# Altium PCB LB77.PcbDoc
Units mm, origin at the board's own origin, x right, y up, seen from the top; angles counter-clockwise.
Board outline 115 x 70 mm, 2 copper layers (Top Layer, Bottom Layer), stack 1.571 mm thick; 59 components, 48 nets, 267 pads, 356 vias.
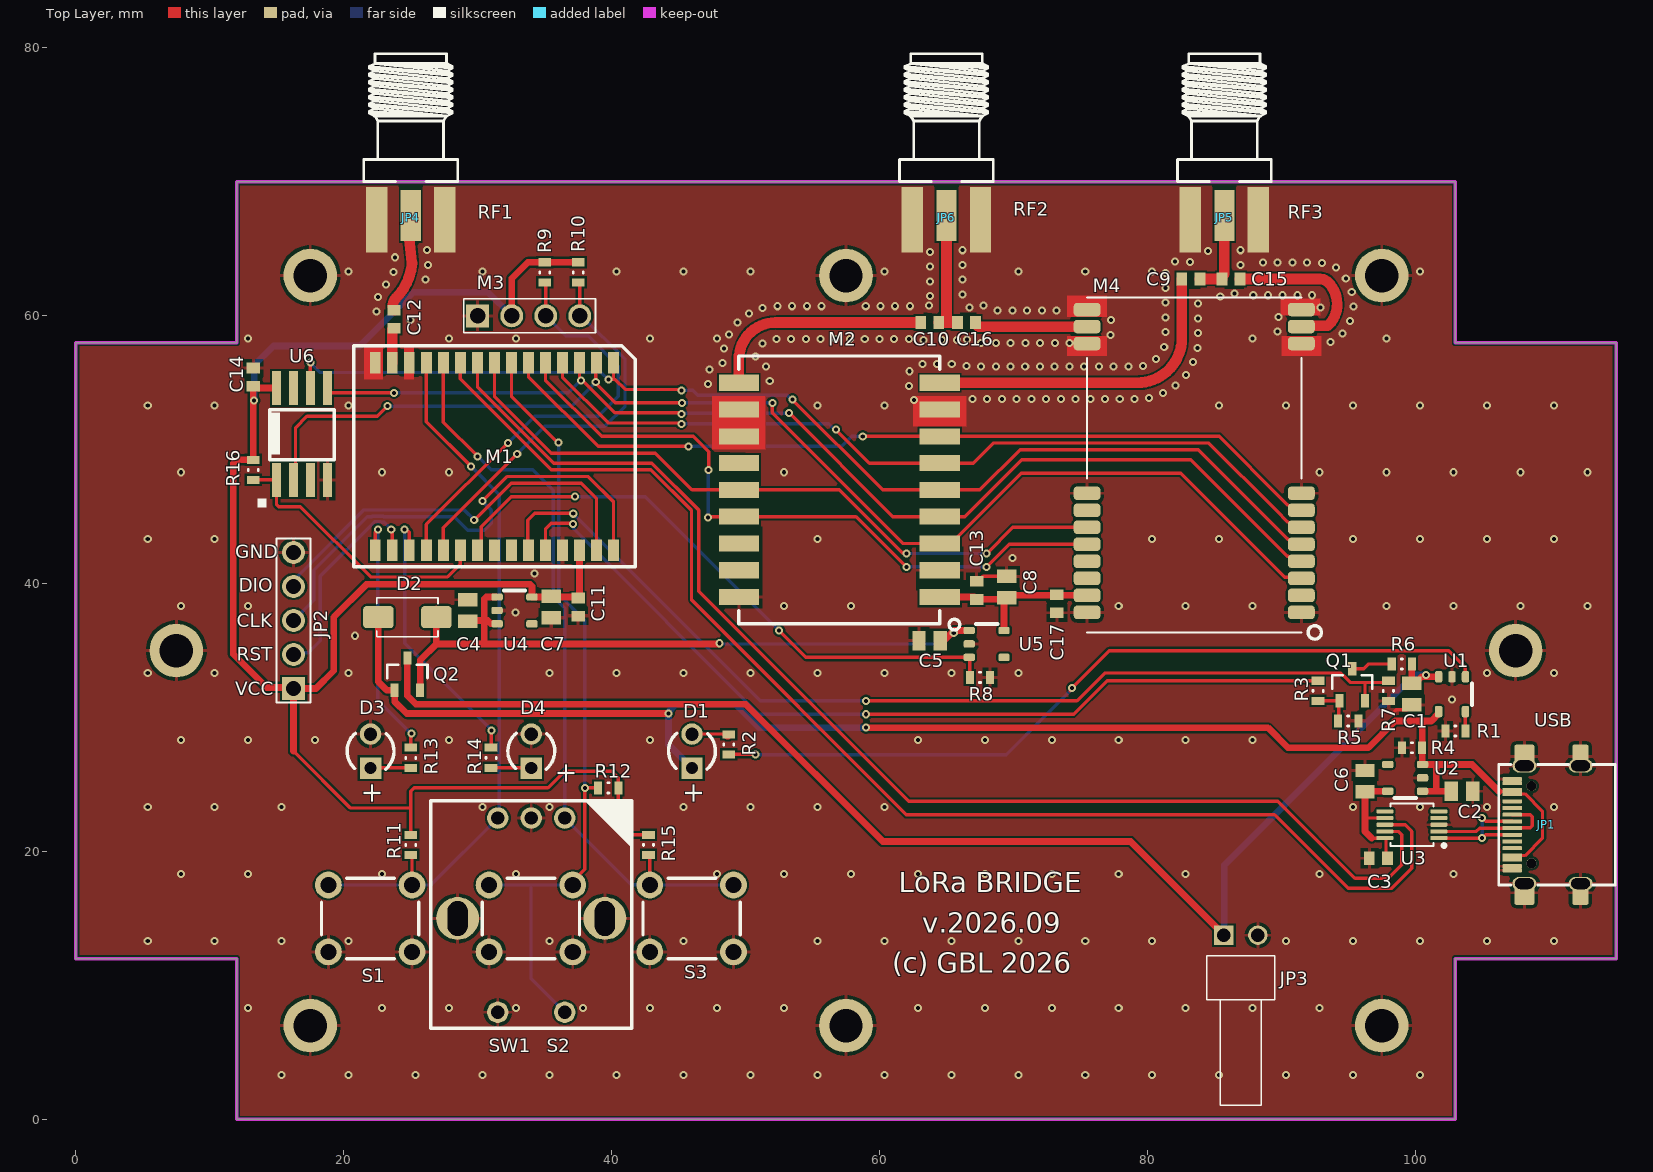
[diagram p0: Top Layer view]
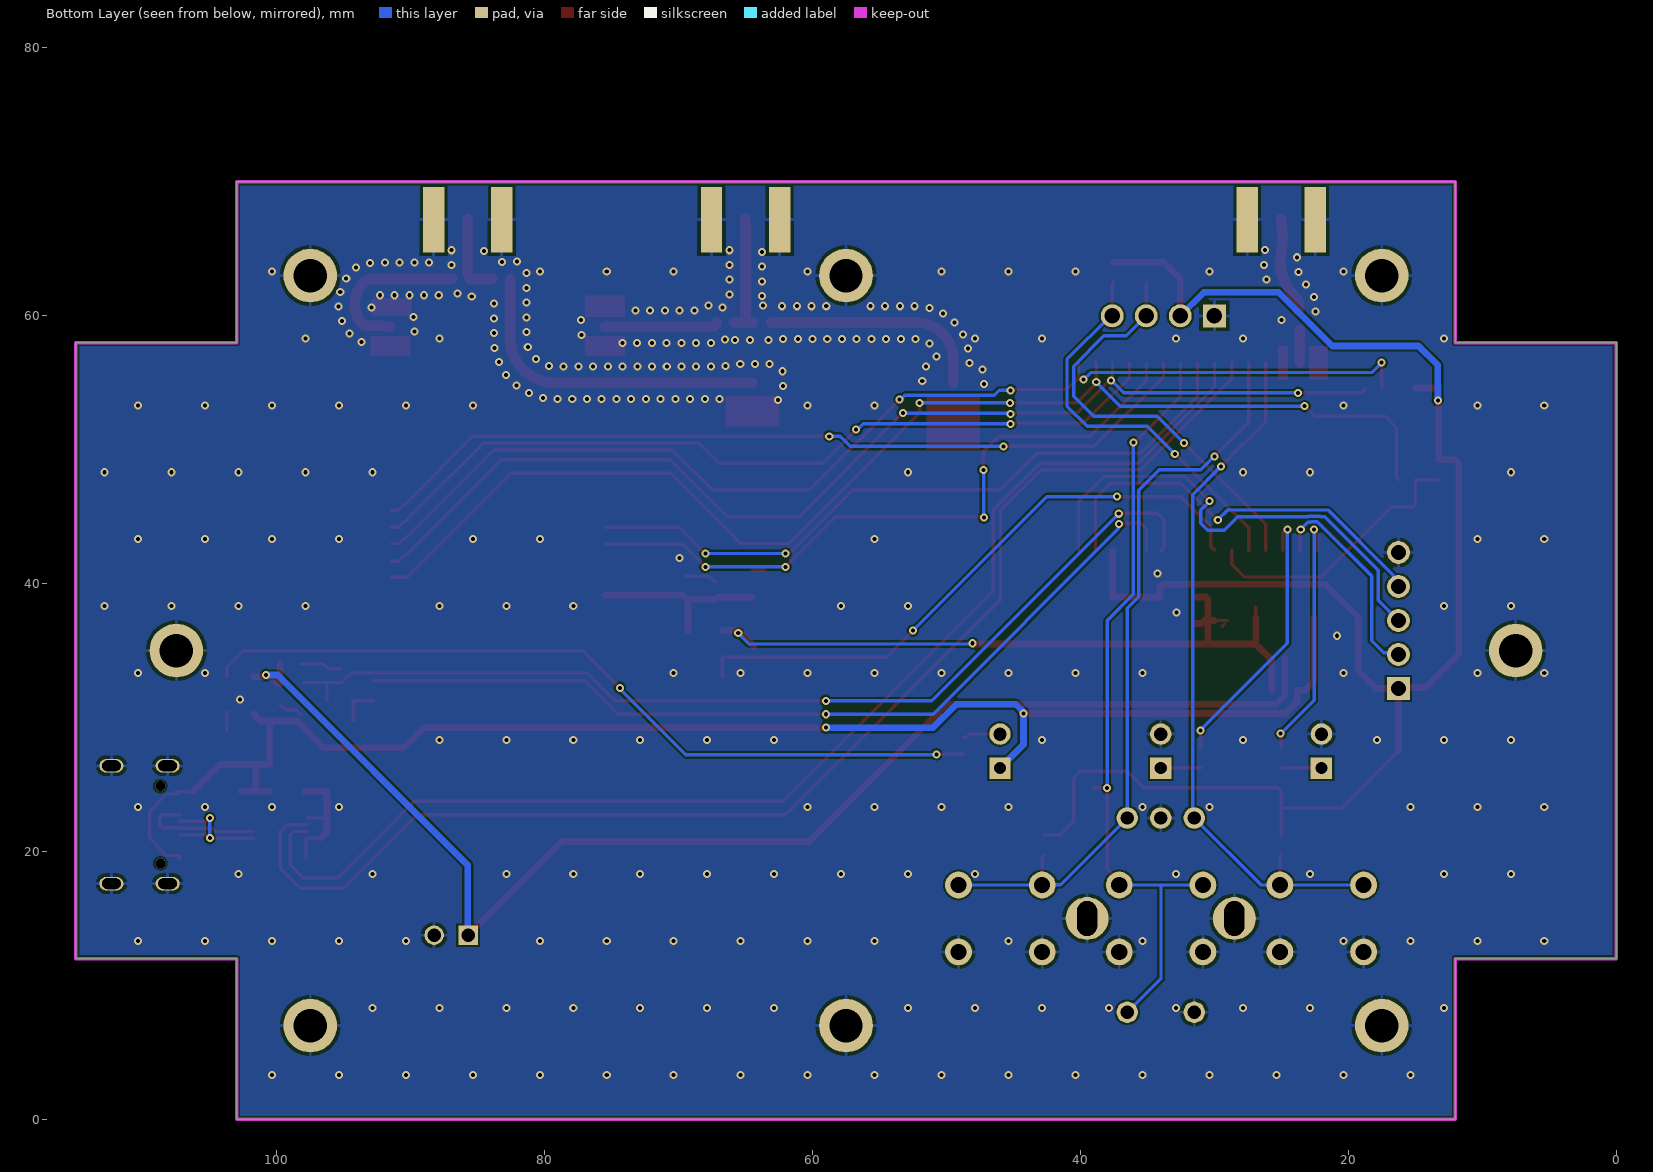
[diagram p1: Bottom Layer view, seen from below]
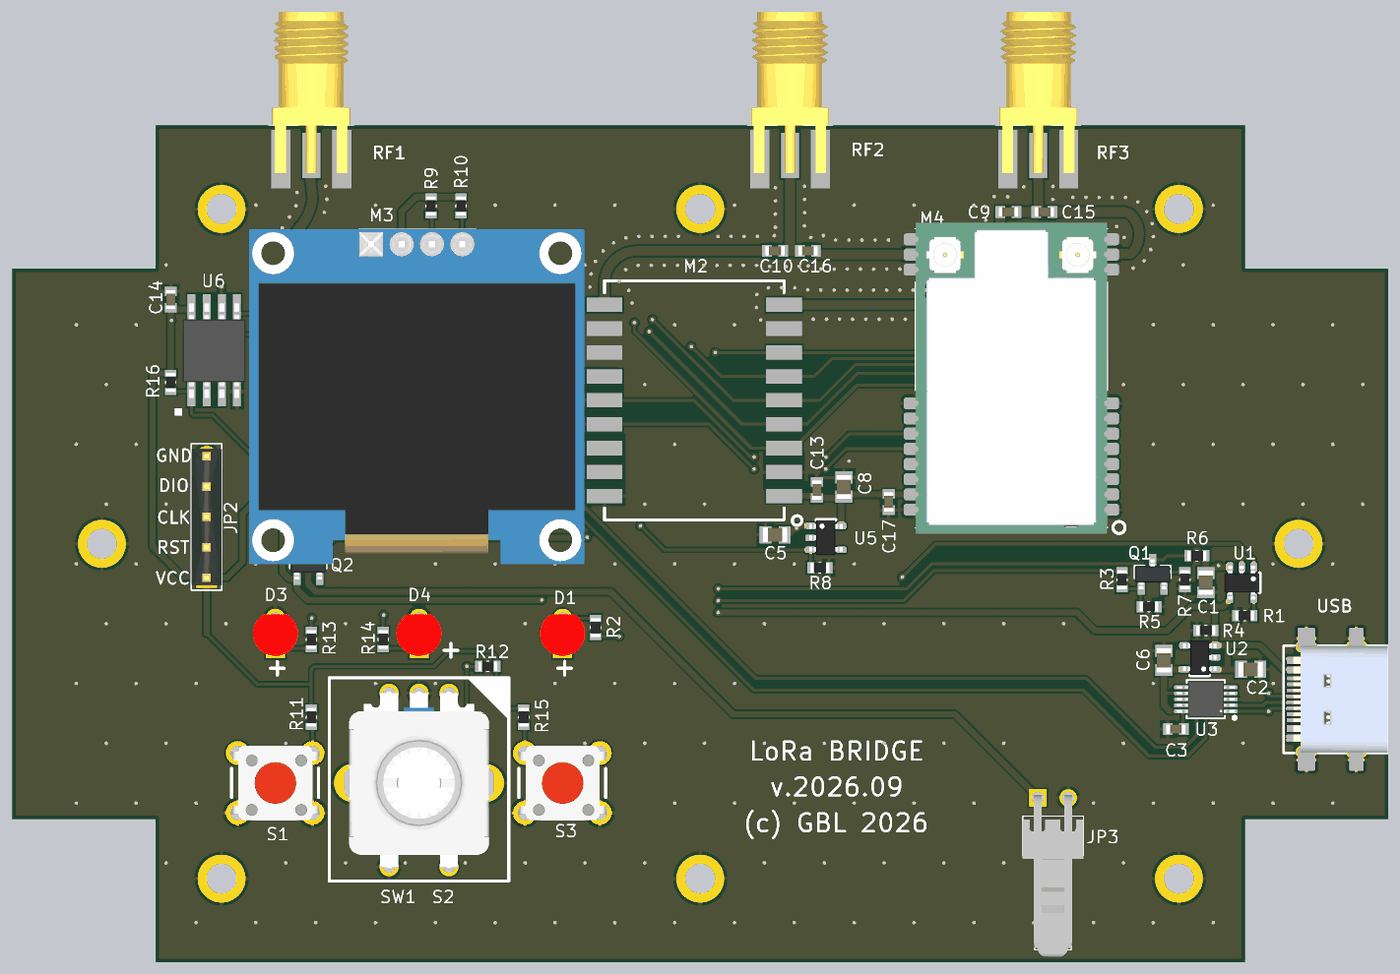
[diagram p2: 3D render of the assembled board from above, using the file's embedded part models]

## Layer stack, top to bottom
Top Solder: solder mask 0.0102, Solder Resist, Dk 3.5
Top Layer: signal copper 0.0356
Dielectric 1: dielectric 1.5, FR-4, Dk 4.8
Bottom Layer: signal copper 0.0356
Bottom Solder: solder mask 0.0102, Solder Resist, Dk 3.5

## Board outline
103,0 12,0 12,12 0,12 0,58 12,58 12,70 103,70 103,58 115,58 115,12 103,12

## Design rules (kind name [scope] priority, off if disabled: settings)
Clearance [All] p1: gap=0.15 ignorepadtopadclearanceinfootprint=FALSE
ComponentClearance ComponentClearance_1 [InComponent('SW1') vs InComponent('S2')] p1: gap=-20 collisioncheckmode=3 verticalgap=-20 showdistances=FALSE
ComponentClearance [All] p2: gap=0.25 collisioncheckmode=3 verticalgap=0.25 showdistances=FALSE
HoleSize [All] p1: absolutevalues=TRUE maxlimit=3.5 minlimit=0.025 maxpercent=80.000 minpercent=20.000
MinimumSolderMaskSliver [All] p1: minsoldermaskwidth=0.05
PolygonConnect PolygonConnect_3 [HasFootprint('SMA_F_EDGE') vs IsNamedPolygon('GND_L01_P000')] p1: connectstyle=Direct reliefconductorwidth=0.254 reliefentries=4 polygonreliefangle="90 Angle" airgapwidth=0.254
PolygonConnect PolygonConnect_2 [All vs IsNamedPolygon('GND_L01_P000') Or IsNamedPolygon('GND_L02_P001')] p2: thpad.connectstyle=Relief thpad.reliefconductorwidth=0.254 thpad.reliefentries=4 thpad.polygonreliefangle="90 Angle" thpad.airgapwidth=0.254 smdpad.connectstyle=Relief smdpad.reliefconductorwidth=0.254 smdpad.reliefentries=4 smdpad.polygonreliefangle="90 Angle" smdpad.airgapwidth=0.254 via.connectstyle=Direct via.reliefconductorwidth=0.254 via.reliefentries=4 via.polygonreliefangle="90 Angle" via.airgapwidth=0.254
PolygonConnect [All] p3: connectstyle=Relief reliefconductorwidth=0.254 reliefentries=4 polygonreliefangle="90 Angle" airgapwidth=0.254
RoutingVias [All] p1: holewidth=0.711 width=1.27 viastyle="Through Hole" minholewidth=0.711 minwidth=1.27 maxholewidth=0.711 maxwidth=1.27
SilkToSilkClearance [All] p1: silktosilkclearance=0.1
SilkToSolderMaskClearance [IsPad] p1: minsilkscreentomaskgap=0.1 clearancetoexposedcopper=TRUE
SolderMaskExpansion [All] p1: expansion=0 istentingtop=FALSE
SupplyNets "Schematic Supply Nets_5" [InNet('VBUS')] p1: voltage=0.000
SupplyNets "Schematic Supply Nets_4" [InNet('VCC2')] p2: voltage=0.000
SupplyNets "Schematic Supply Nets_3" [InNet('GND')] p3: voltage=0.000
SupplyNets "Schematic Supply Nets_2" [InNet('VCC1')] p4: voltage=0.000
SupplyNets "Schematic Supply Nets_1" [InNet('VCC')] p5: voltage=0.000
SupplyNets "Schematic Supply Nets" [InNet('V_BATT')] p6: voltage=0.000
Width [All] p1: maxlimit=2 minlimit=0.2 preferedwidth=0.25
25 further rules are at their usual default settings.

## Components (designator, comment, footprint, x,y, rotation, side; value= is the part's Value field where it differs from the comment)
C1 "10uF" C-0805 99.75,31.75 r270 top
C2 "10uF" C-0805 103.5,24.5 r0 top
C3 "100nF" C-0603 97.25,19.5 r180 top
C4 "10uF" C-0805 29.25,38 r90 top
C5 "10uF" C-0805 63.75,35.75 r180 top
C6 "10uF" C-0805 96.25,25.25 r90 top
C7 "10uF" C-0805 35.5,38.25 r270 top
C8 "CAPN" C-0805 69.5,39.75 r90 top
C9 "100pF" C-0603 83.25,62.75 r0 top
C10 "100pF" C-0603 63.75,59.5 r0 top
C11 "1nF" C-0603 37.5,38.25 r270 top
C12 "100pF" C-0603 23.75,59.75 r90 top
C13 "1nF" C-0603 67.25,39.5 r90 top
C14 "100nF" C-0603 13.25,55.425 r270 top
C15 "100pF" C-0603 86.25,62.75 r180 top
C16 "100pF" C-0603 66.5,59.5 r180 top
C17 "1nF" C-0603 73.25,38.5 r270 top
D1 "DLED" LED_3mm_RED 46,27.5 r90 top locked
D2 "SS14" D-SMA 24.75,37.5 r0 top
D3 "DLED" LED_3mm_RED 22,27.5 r90 top locked
D4 "DLED" LED_3mm_RED 34,27.5 r90 top locked
JP1 "L-KLS1-5473" USB_C_SMD_SLOT 107.25,22 r90 top
JP2 "HEADER 5" PLS1-5 16.25,32.17 r90 top
JP3 "CON2" WH-02R 85.71,13.75 r0 top
JP4 "EM-SA071-GGT" SMA_F_EDGE 25,68.75 r270 top
JP5 "EM-SA071-GGT" SMA_F_EDGE 85.75,68.75 r270 top
JP6 "EM-SA071-GGT" SMA_F_EDGE 65,68.75 r270 top
M1 "E77-400M22S" E77XX-M22 31.25,49.5 r270 top
M2 "LORA2021" LORA1121 57,47 r180 top
M3 "OLED0_96" OLED096_I2C 30,60 r0 top locked
M4 "E80-400M2213S" E80 83.5,48.86 r180 top
Q1 "2N7002" SOT-23 95.3,32.45 r90 top
Q2 "IRLML6401" SOT-23 24.75,33.25 r90 top
R1 "4k7" R-0603 103,29 r0 top
R2 "1k" R-0603 48.75,28 r90 top
R3 "1k" R-0603 92.75,32 r90 top
R4 "100k" R-0603 99.75,27.75 r0 top
R5 "1M" R-0603 95,29.75 r180 top
R6 "100k" R-0603 99,34 r0 top
R7 "10k" R-0603 98,32 r90 top
R8 "100k" R-0603 67.5,33 r180 top
R9 "10k" R-0603 35,63.25 r90 top
R10 "10k" R-0603 37.5,63.25 r90 top
R11 "100k" R-0603 25,20.5 r90 top
R12 "100k" R-0603 39.75,24.75 r0 top
R13 "1k" R-0603 25,27 r90 top
R14 "1k" R-0603 31,27 r90 top
R15 "100k" R-0603 42.75,20.5 r90 top
R16 "100k" R-0603 13.25,48.5 r90 top
S1 "KLS7-TS3602 -3 15-180" KN_MIN 22,15 r0 top
S2 "KLS7-TS3602 -3 15-180" KN_MIN 34,15 r0 top locked
S3 "KLS7-TS3602 -3 15-180" KN_MIN 46,15 r0 top
SW1 "EC11" EC11 34,15 r270 top locked
U1 "STC4054GR" SOT-23-5 102.75,31.75 r270 top
U2 "LP5907MFX-3.0" SOT-23-5 99.25,25.5 r180 top
U3 "CH340E" MSOP-10 99.75,22 r90 top value={Value}
U4 "LP5907MFX-3.0" SOT-23-5 32.75,38 r0 top
U5 "LP5907MFX-3.0" SOT-23-5 68,35.5 r0 top
U6 "W25Q64FV" SOIC8-208 14.98,47.75 r90 top

## Footprints (in the part's own frame and the unit in brackets; to place one, negate y for a bottom-side part, rotate by r counter-clockwise, add the part's x,y. Pads: shape width x height; smd on the part's side, far side on the other; paste and mask are expansions set on the pad)
C-0603 [mm] "Chip Capacitor, 2-Leads, Body 1,60x0,80mm, IPC Medium Density"
  rect 0.8x1 smd: 1(-0.675,0) 2(0.675,0)
  body extent -0.8,-0.4 0.8,0.4, height 0.8
C-0805 [mm] "Chip Capacitor, 2-Leads, Body 2,00x1,25mm, IPC Medium Density"
  rect 1x1.45 smd: 1(-0.8,0) 2(0.8,0)
  body extent -1,-0.62 1,0.63, height 1.25
D-SMA [mm] "Diode, Molded Body; 4.315 mm L X 2.605 mm W X 2.41 mm H body"
  rrect30% 2.27x1.65 smd: 1(-2.165,0) 2(2.165,0)
  silkscreen extent -2.29,-1.46 2.29,1.46, body extent -2.61,-1.3 2.61,1.3, height 2.41
E77XX-M22 [mm]
  rect 1.6x0.8 smd: 1(-7,8.89) 2(-7,7.62) 3(-7,6.35) 4(-7,5.08) 5(-7,3.81) 6(-7,2.54) 7(-7,1.27) 8(-7,0) 9(-7,-1.27) 10(-7,-2.54) 11(-7,-3.81) 12(-7,-5.08) 13(-7,-6.35) 14(-7,-7.62) 15(-7,-8.89) 16(7,-8.89) 17(7,-7.62) 18(7,-6.35) 19(7,-5.08) 20(7,-3.81) 21(7,-2.54) 22(7,-1.27) 23(7,0) 24(7,1.27) 25(7,2.54) 26(7,3.81) 27(7,5.08) 28(7,6.35) 29(7,7.62) 30(7,8.89)
  silkscreen extent -8.25,-10.5 8.25,10.5, body extent -7,-9.68 7,10.3, height 2.7
E80 [mm]
  rrect50% 2x1 smd: 1(-8,11) 2(-8,9.73) 3(-8,8.46) 4(-8,7.19) 5(-8,5.92) 6(-8,4.65) 7(-8,3.38) 8(-8,2.11) 11(-8,-9.06) 12(-8,-10.33) 13(-8,-11.6) 14(8,-11.6) 15(8,-10.33) 16(8,-9.06) 19(8,2.11) 20(8,3.38) 21(8,4.65) 22(8,5.92) 23(8,7.19) 24(8,8.46) 25(8,9.73) 26(8,11)
  silkscreen extent -9.5,-12.5 8,13, body extent -8,-13 8,13, height 2.85
EC11 [mm] "ALPS rotary encoder"
  round 1.6 hole 1: 1(-7.5,2.5) 2(-7.5,0) 3(-7.5,-2.5) 4(7,-2.5) 5(7,2.5)
  round 3.2 hole 1.5 slot 2.6 at 0 deg: 6(0,5.5) 6(0,-5.5)
  silkscreen extent -8.8,-7.5 8.2,7.5, body extent -7.73,-5.86 7.22,5.86, height 19.5
KN_MIN [mm]
  round 2 hole 1.2 mask+0.05: 1(-3.15,-2.5) 1(3.1,-2.5) 2(-3.15,2.5) 2(3.1,2.5)
  silkscreen extent -3.66,-3 3.6,3, body extent -3.95,-3.1 3.95,3.1, height 7.01
LED_3mm_RED [mm]
  rect 1.6x1.6 hole 0.9: 1(-1.27,0)
  round 1.6 hole 1: 2(1.27,0)
  silkscreen extent -1.34,-1.75 1.34,1.75, body extent -1.9,-1.9 1.6,1.9, height 5.75
LORA1121 [mm]
  rect 3x1.2 smd: 1(-7.5,8) 2(-7.5,6) 3(-7.5,4) 4(-7.5,2) 5(-7.5,0) 6(-7.5,-2) 7(-7.5,-4) 8(-7.5,-6) 9(-7.5,-8) 10(7.5,-8) 11(7.5,-6) 12(7.5,-4) 13(7.5,-2) 14(7.5,0) 15(7.5,2) 16(7.5,4) 17(7.5,6) 18(7.5,8)
  silkscreen extent -8.99,-10 7.5,10.46, body extent -7.5,-10 7.5,10, height 2
MSOP-10 [mm] "Small Outline Pkg (SOP), 0.50 mm pitch; 10 pin, 3.00 mm L X 3.00 mm W X 1.10 mm H body"
  rrect52% 0.31x1.27 smd: 1(-1,-2.015) 2(-0.5,-2.015) 3(0,-2.015) 4(0.5,-2.015) 5(1,-2.015) 6(1,2.015) 7(0.5,2.015) 8(0,2.015) 9(-0.5,2.015) 10(-1,2.015)
  silkscreen extent -1.68,-2.53 1.6,1.6, body extent -1.5,-2.42 1.5,2.42, height 1.1
OLED096_I2C [mm] "Header, Vertical, 2.54 mm pitch; 0.70 mm lead width, 7 pins, 1 row, 7 pins per row, 16.51 mm L X 2.54 mm W X 7.54 mm H body"
  rect 1.71x1.71 hole 1.14 paste-2539.97: 1(0,0)
  round 1.71 hole 1.14 paste-2539.97: 2(2.54,0) 3(5.08,0) 4(7.62,0)
  silkscreen extent -1.04,-1.27 8.8,1.27, body extent -10.19,-26.7 17.81,1.3, height 7.08
PLS1-5 [mm] "Header, Vertical, 2.54 mm pitch; 0.70 mm lead width, 5 pins, 1 row, 5 pins per row, 11.43 mm L X 2.54 mm W X 7.54 mm H body"
  rect 1.71x1.71 hole 1.14 paste-2539.97: 1(0,0)
  round 1.71 hole 1.14 paste-2539.97: 2(2.54,0) 3(5.08,0) 4(7.62,0) 5(10.16,0)
  silkscreen extent -1.04,-1.27 11.2,1.27, body extent -0.64,-1.27 10.79,1.27, height 7.54
R-0603 [mm] "Chip Resistor, 2-Leads, Body 1,60x0,82mm, IPC Medium Density"
  rect 0.6x0.95 smd: 1(-0.75,0) 2(0.75,0)
  silkscreen extent -0.05,-0.38 0.05,0.38, body extent -0.8,-0.4 0.8,0.4, height 0.45
SMA_F_EDGE [mm] "SMA End Launch Jack for 1.58mm PCB, 50 Ohm, Flat Tab Contact"
  rect 3.81x1.5 smd: 1(1.27,0)
  rect 4.9x1.6 smd: 2(1.575,2.54) 2(1.575,-2.54)
  rect 4.9x1.6 smd far side: 2(1.575,2.54) 2(1.575,-2.54)
  silkscreen extent -10.81,-3.5 -1.28,3.5, body extent -10.73,-3.25 2.77,3.25, height 3.7
SOIC8-208 [mil]
  rect 100x26 smd: 1(0,0) 2(0,-50) 3(0,-100) 4(0,-150) 5(270,-150) 6(270,-100) 7(270,-50) 8(270,0)
  silkscreen extent -80,-170 207,55, body extent -22,-179 289,29, height 39
SOT-23 [mm]
  rect 1x0.6 smd: 1(-1.2,0.95) 2(-1.2,-0.95) 3(1.2,0)
  silkscreen extent -0.3,-1.5 0.7,1.5, body extent -1.25,-1.5 1.25,1.5, height 1.2
SOT-23-5 [mm]
  rrect50% 0.85x0.55 smd mask+0.06: 1(-1.3,1) 2(-1.3,0) 3(-1.3,-1) 4(1.3,-1) 5(1.3,1)
  silkscreen extent -0.8,1.5 0.8,1.5, body extent -1.4,-1.45 1.4,1.45, height 1.45
USB_C_SMD_SLOT [mm] "USB 3.1 Type C"
  rrect20% 1.8x1.2 smd mask+0.07: 1(-5.08,-5.08) 1(5.08,-5.08)
  rrect20% 1.8x1.5 smd mask+0.07: 1(-5.08,-0.9) 1(5.08,-0.9)
  oval 1x1.8 hole 0.8 slot 1.4 at 90 deg: 1(-4.4,-5.1) 1(-4.4,-0.9) 1(4.4,-5.1) 1(4.4,-0.9)
  rrect30% 0.3x1.45 smd paste-2 mask+0.07: A1(-3.1,0) A4(-2.6,0) A9(2.6,0) A12(3.4,0) B1(3.1,0) B4(2.3,0) B9(-2.3,0) B12(-3.4,0)
  rrect30% 0.3x1.45 smd mask+0.07: A5(-1.25,0) A6(-0.25,0) A7(0.25,0) A8(1.25,0) B5(1.75,0) B6(0.75,0) B7(-0.75,0) B8(-1.75,0)
  round 0.75 hole 0.75 unplated paste-2539.97 mask+0.07: MH(-2.885,-1.44) MH(2.885,-1.44)
  silkscreen extent -4.5,-7.69 4.5,1, body extent -4.47,-7.7 4.47,0.2, height 3.2
WH-02R [mm]
  rect 1.45x1.45 hole 1: 1(0,0)
  round 1.45 hole 1: 2(2.54,0)
  silkscreen extent -1.27,-12.7 3.81,-1.52, body extent -1.3,-13.3 3.8,0.27, height 5.9

## Part data
C1 C2 C3 C4 C5 C6 C7 C9 C10 C11 C12 C13 C14 C15 C16 C17: library part CAPN, Voltage=50V, Вид=Конденсатор, Точність/група=NP0
C8: Voltage=50V, Вид=Конденсатор, Точність/група=NP0
D2: library part DIODSH, Вид=Діод
JP4 JP5 JP6: library part SMA, "SMA Female R/A PCB Mount", Вид=Роз'єм
M2: library part LORAXX21
M3: library part OLED0_96_I2C
M4: library part E80
Q1: library part MOSF-N, Вид=Транзистор
Q2: library part MOSF-P, Вид=Транзистор
R1 R2 R3 R4 R5 R6 R7 R8 R9 R10 R11 R12 R13 R14 R15 R16: library part RES, Вид=Резистор, Точність/група=5%
S1 S2 S3: library part SW-1, Вид=Кнопка
U1: library part STC4054
U2 U4 U5: library part LP5907, "250mA Low-Dropout Regulator", Вид=Мікросхема
D1 D3 D4: Вид=Світлодіод
JP1 U3: Mounting  Method=SMD
JP2 JP3: Вид=Роз'єм
U6: Вид=Мікросхема

## Free pads (board coordinates)
  round 4 hole 2.5: 0(7.5,35) 0(17.5,7) 0(17.5,63) 0(57.5,7) 0(57.5,63) 0(97.5,7) 0(97.5,63) 0(107.5,35)

## Via types
v1: diameter 0.6, hole 0.3, Top Layer to Bottom Layer, tented both sides, 356 vias

## Nets (pads, with @x,y where several pads share a name; then routed paths per layer and width w, separated by ;. In a path a pad name is that pad's centre, name@x,y a point inside that pad or via, vN(x,y) a via of type N, cw(c..) or ccw(c..) an arc to the next point about the centre after c; other vN are vias at no path point)
ACT/WKUP: M1.7 R12.1 S2.2 SW1.5 | length 59.5
  Top Layer w0.25: M1.7 32.52,53.98 v1@36,50.5 ; S2.2@37.1,17.5 37.1,17.785 38,18.685 v1(38,24.75) R12.1
  Bottom Layer w0.25: S2.2@30.85,17.5 33.975,17.5 ; v1(36.045,50.551) 36.045,39.205 38,37.25 v1(38,24.75) ; SW1.5 33.975,10.525 33.975,17.5 ; S2.2@37.1,17.5 33.975,17.5
ADC: M1.23
BATT_LEVEL: M1.25 Q1.2 R7.2 | length 75.4
  Top Layer w0.25: M1.25 34,42.5 33.75,42.75 33.75,44.75 34.25,45.25 v1@37.25,45.25 ; v1(59,31.25) 74.75,31.25 76.827,33.327 94.431,33.327 94.723,33.035 95.135,32.623 96.25,32.623 ; Q1.2 96.25,32.623 ; R7.2@98,32.623 96.25,32.623
  Bottom Layer w0.25: v1(37.134,45.221) 51.106,31.25 v1(59,31.25)
BATT_MEAS: M1.26 R3.2 | length 66.6
  Top Layer w0.25: M1.26 35.06,44.06 35.5,44.5 37.04,44.5 v1(37.101,44.438) ; v1(59,30.25) 74.5,30.25 77,32.75 R3.2@92.795,32.75
  Bottom Layer w0.25: v1(37.101,44.438) 37.168,44.372 37.168,44.082 51,30.25 v1(59,30.25)
BUSY1121: M1.6 M2.7 M4.7 | length 63.5
  Top Layer w0.25: M1.6 33.79,55.46 39,50.25 v1(45.75,50.25) ; v1(58.75,51) 85.358,51 90.119,46.239 90.489,45.869 90.544,45.869 90.933,45.48 M4.7
  Bottom Layer w0.25: v1(45.75,50.25) 57.178,50.25 57.942,51.014 58.736,51.014 v1(58.75,51)
DN: JP1.A7 JP1.B7 U3.1 | length 9.4
  Top Layer w0.25: U3.1 v1(105,21) 105.25,21.25 JP1.B7 ; v1(105,22.5) 105.25,22.25 JP1.A7
  Bottom Layer w0.25: v1(105,21) v1(105,22.5)
DOWN: M1.12 R11.1 S1.2 SW1.3 | length 53.3
  Top Layer w0.25: R11.1 25.1,19.65 S1.2@25.1,17.5 ; M1.12 26.17,52.08 v1(29.5,48.75)
  Bottom Layer w0.25: S1.2@18.85,17.5 25.1,17.5 26.5,17.5 SW1.3 31.622,22.622 31.622,46.628 v1(29.5,48.75)
DP: JP1.A6 JP1.B6 U3.2 | length 9.4
  Top Layer w0.25: U3.2 104.562,21.5 104.811,21.75 JP1.A6 107.273,21.773 108.601,21.773 108.75,21.922 108.75,22.601 108.601,22.75 JP1.B6
EN1121: M1.22 R8.2 U5.3 | length 45.8
  Top Layer w0.25: M1.22 30.253,42.773 30.253,44.253 32.5,46.5 v1(37.25,46.5) ; v1(52.5,36.5) 54.5,34.5 66.75,34.5 66.75,33.25 R8.2
  Bottom Layer w0.25: v1(37.25,46.5) 42.5,46.5 v1(52.5,36.5)
FLASH_CE: M1.21 R16.1 U6.1 | length 21
  Top Layer w0.25: R16.1 U6.1 14.98,45.899 15.129,45.75 16.75,45.75 22,40.5 27.75,40.5 28.71,41.46 M1.21
GND: C1.2 C2.2 C3.2 C4.2 C5.2 C6.2 C7.2 C8.2 C11.2 C13.2 C14.1 C17.2 D3.2 D4.2 JP1.1 JP1.A1 JP1.A12 JP1.B1 JP1.B12 JP2.5 JP3.2 JP4.2 JP5.2 JP6.2 M1.13 M1.15 M1.27 M2.2 M2.8 M2.11 M2.12 M2.18 M3.1 M4.1 M4.8 M4.11 M4.13 M4.14 M4.16 M4.19 M4.26 pad.0 R1.1 R4.1 R5.1 R7.1 R8.1 S1.1 S2.1 S3.1 SW1.2 SW1.4 SW1.6 U1.2 U2.2 U3.3 U4.2 U5.2 U6.4 | length 5.1
  Top Layer w0.25: M2.2@63.6,41 M2.2 ; C13.2 67.35,40.175 67.725,40.55 C8.2 ; 98.25,30.25 98.575,30.575 99.375,30.575 C1.2
  other v1: 15.364,3.318 20.364,3.318 25.364,3.318 30.364,3.318 35.364,3.318 40.364,3.318 45.364,3.318 50.364,3.318 55.364,3.318 60.364,3.318 65.364,3.318 70.364,3.318 75.364,3.318 80.364,3.318 85.364,3.318 90.364,3.318 95.364,3.318 100.364,3.318 12.864,8.318 22.864,8.318 27.864,8.318 32.864,8.318 37.864,8.318 42.864,8.318 47.864,8.318 52.864,8.318 62.864,8.318 67.864,8.318 72.864,8.318 77.864,8.318 82.864,8.318 87.864,8.318 92.864,8.318 5.364,13.318 10.364,13.318 15.364,13.318 20.364,13.318 35.364,13.318 45.364,13.318 55.364,13.318 60.364,13.318 65.364,13.318 70.364,13.318 75.364,13.318 80.364,13.318 90.364,13.318 95.364,13.318 100.364,13.318 105.364,13.318 110.364,13.318 7.864,18.318 12.864,18.318 22.864,18.318 32.864,18.318 47.864,18.318 52.864,18.318 57.864,18.318 62.864,18.318 67.864,18.318 72.864,18.318 77.864,18.318 82.864,18.318 92.864,18.318 102.864,18.318 5.364,23.318 10.364,23.318 15.364,23.318 30.364,23.318 35.364,23.318 45.364,23.318 50.364,23.318 55.364,23.318 60.364,23.318 95.364,23.318 100.364,23.318 105.364,23.318 110.364,23.318 7.864,28.318 12.864,28.318 17.864,28.318 27.864,28.318 42.864,28.318 62.864,28.318 67.864,28.318 72.864,28.318 77.864,28.318 82.864,28.318 87.864,28.318 102.753,31.349 5.364,33.318 10.364,33.318 20.364,33.318 35.364,33.318 40.364,33.318 45.364,33.318 50.364,33.318 55.364,33.318 60.364,33.318 65.364,33.318 70.364,33.318 105.364,33.318 110.364,33.318 20.823,36.111 32.823,37.861 7.864,38.318 12.864,38.318 52.864,38.318 57.864,38.318 77.864,38.318 82.864,38.318 87.864,38.318 97.864,38.318 102.864,38.318 107.864,38.318 112.864,38.318 34.25,40.75 69.946,41.915 5.364,43.318 10.364,43.318 55.364,43.318 80.364,43.318 85.364,43.318 95.364,43.318 100.364,43.318 105.364,43.318 110.364,43.318 7.864,48.318 22.864,48.318 27.864,48.318 52.864,48.318 92.864,48.318 97.864,48.318 102.864,48.318 107.864,48.318 112.864,48.318 5.364,53.318 10.364,53.318 20.364,53.318 55.364,53.318 60.364,53.318 85.364,53.318 90.364,53.318 95.364,53.318 100.364,53.318 105.364,53.318 110.364,53.318 62.565,53.726 66.94,53.785 68.04,53.785 69.14,53.785 70.24,53.785 71.34,53.785 72.44,53.785 73.54,53.785 74.64,53.785 75.74,53.785 76.84,53.785 77.94,53.785 79.04,53.785 80.136,53.877 81.181,54.22 62.193,54.761 82.11,54.808 47.193,54.898 51.807,55.135 82.879,55.595 62.242,55.86 47.297,55.993 51.532,56.2 67.583,56.215 68.683,56.215 69.783,56.215 70.883,56.215 71.983,56.215 73.083,56.215 74.183,56.215 75.283,56.215 76.383,56.215 77.483,56.215 78.583,56.215 66.483,56.238 79.682,56.263 63.196,56.407 64.296,56.407 65.396,56.407 48.285,56.476 83.421,56.552 80.662,56.762 50.732,56.955 48.378,57.572 83.731,57.608 81.261,57.685 51.262,57.919 67.589,57.975 68.689,57.975 69.789,57.975 70.889,57.975 71.989,57.975 73.089,57.975 74.189,57.975 93.665,58.061 63.296,58.193 64.677,58.193 65.777,58.193 66.522,58.239 52.3,58.285 53.4,58.285 54.5,58.285 55.6,58.285 56.7,58.285 57.8,58.285 58.9,58.285 60,58.285 61.1,58.285 62.2,58.285 12.864,58.318 27.864,58.318 32.864,58.318 42.864,58.318 47.864,58.318 87.864,58.318 97.864,58.318 77.246,58.576 48.748,58.608 94.587,58.662 83.79,58.706 81.36,58.78 89.701,58.817 49.394,59.498 95.145,59.61 77.281,59.676 24.98,59.696 83.79,59.806 81.36,59.88 89.803,59.913 50.263,60.173 22.443,60.311 68.818,60.405 69.918,60.405 71.018,60.405 72.118,60.405 73.218,60.405 51.282,60.587 66.728,60.623 92.926,60.626 95.376,60.685 52.374,60.715 53.474,60.715 54.574,60.715 55.674,60.715 58.974,60.715 60.074,60.715 61.174,60.715 62.274,60.715 63.684,60.779 67.784,60.779 83.79,60.906 81.36,60.98 22.565,61.405 85.443,61.443 63.785,61.473 87.908,61.535 89.008,61.535 90.108,61.535 91.208,61.535 92.308,61.535 66.215,61.596 86.521,61.661 95.263,61.779 81.36,62.08 23.166,62.326 63.785,62.573 66.215,62.696 26.091,62.722 94.816,62.784 81.368,63.18 23.721,63.276 20.364,63.318 30.364,63.318 40.364,63.318 45.364,63.318 50.364,63.318 60.364,63.318 70.364,63.318 75.364,63.318 80.364,63.318 100.364,63.318 94.07,63.593 63.785,63.673 26.297,63.803 66.215,63.796 86.965,63.796 88.632,63.965 89.732,63.965 90.832,63.965 91.932,63.965 93.032,63.957 82.053,64.041 83.184,64.029 23.819,64.371 63.785,64.773 84.535,64.849 26.205,64.899 66.215,64.896 86.965,64.896
GREEN: M1.16 R13.2 | length 18.8
  Top Layer w0.25: M1.16 22.36,43.86 v1@22.5,44 ; R13.2 v1@25,28.75
  Bottom Layer w0.25: v1(22.545,44.051) 22.545,31.301 v1(25.045,28.801)
INT1121: M1.5 M2.15 M4.22 | length 51.2
  Top Layer w0.25: M1.5 35.06,55.19 39.25,51 46.111,51 47.25,49.861 v1(47.25,48.5) ; v1@47.25,45 M2.15 58.25,45 v1(62,41.25) ; v1(68,41.25) 69.69,42.94 M4.22
  Bottom Layer w0.25: v1(47.203,44.935) 47.226,44.959 47.226,48.476 v1(47.25,48.5) ; v1(62,41.25) v1(68,41.25)
MISO: M1.2 M2.3 M4.3 U6.2 | length 93
  Top Layer w0.25: U6.2 16.401,47.901 16.401,51.651 17.25,52.5 22.5,52.5 v1(23.25,53.25) ; v1(38.815,55.048) v1@38.884,55.116 ; M1.2 38.815,56.445 38.815,55.185 v1@38.884,55.116 ; v1(45.25,53.5) 40.269,53.5 38.881,54.888 38.881,55.114 v1@38.884,55.116 ; v1(52,53.5) 52,52.75 61.75,43 65.4,43 65.873,43.473 65.873,43.531 70.592,48.25 82.5,48.25 90.271,40.479 91.421,40.479 M4.3
  Bottom Layer w0.25: v1(23.25,53.25) 37.018,53.25 v1(38.815,55.048) ; v1(45.25,53.5) v1(52,53.5)
MOSI: M1.3 M2.4 M4.4 U6.5 | length 83.8
  Top Layer w0.25: U6.5 18.79,54.453 18.993,54.25 v1(23.75,54.25) ; M1.3 37.6,55.4 40.25,52.75 v1@45.25,52.75 ; v1(53.25,52.75) 61,45 66.381,45 70.631,49.25 83.25,49.25 87.75,44.75 90.441,42.059 90.544,42.059 90.933,41.67 M4.4
  Bottom Layer w0.25: v1(23.75,54.25) 36.768,54.25 v1(37.703,55.185) ; v1(45.203,52.685) 45.235,52.718 53.218,52.718 v1(53.25,52.75)
NetC4_1: C4.1 C5.1 D2.2 Q2.2 U4.1 U4.3 U5.1 | length 55.2
  Top Layer w0.25: D2.2 D2.2@26.915,38.25 ; C4.1@29.005,37.25 C4.1@29.975,37.25 ; C4.1@29.24,36.987 C4.1@29.4,36.827 ; 31.4,35.6 31.5,35.5
  Top Layer w0.5: Q2.2 25.7,34.285 26.915,35.5 ; D2.2 26.915,35.5 ; 30,37.25 30.5,37.25 30.75,37.25 30.975,37.025 31.425,37.025 U4.3 ; 30.5,37 30.5,35.5 ; 30.5,37.275 30.5,38.851 30.649,39 U4.1@31.343,39 ; 31.4,35.5 30.5,35.5 ; 31.5,35.5 v1@48,35.5 ; C5.1@64.413,35.337 65.575,36.5 U5.1 ; 26.915,35.5 30.5,35.5
  Bottom Layer w0.25: v1(48.045,35.551) 48.096,35.5 64.744,35.5 v1(65.545,36.301)
NetC9_1: C9.1 M2.9 | length 24.4
  Top Layer w0.8: M2.9 79.25,55 ccw(c79.25,58.325) 82.575,58.325 C9.1
NetC10_1: C10.1 M2.10 | length 16.9
  Top Layer w0.8: M2.10 49.5,56.75 cw(c52.25,56.75) 52.25,59.5 C10.1
NetC12_1: C12.1 M1.14 | length 2.6
  Top Layer w0.25: C12.1@23.63,58.955 C12.1
  Top Layer w0.8: M1.14 C12.1@23.63,58.955
NetC12_2: C12.2 JP4.1 | length 7.2
  Top Layer w0.8: C12.2@23.75,60.425 cw(c24.473,60.767) 23.902,61.326 ccw(c20.92,64.264) 25.071,63.725 ccw(c20.92,64.264) 25.083,63.831 ccw(c24.287,63.912) 25.087,63.912 ccw(c24.287,63.912) 25.087,63.923 ccw(c24.287,63.912) 25.083,63.998 ccw(c24.287,63.912) 25.082,64 24.892,65.725 JP4.1@25,67.23
NetC15_1: C15.1 M4.12 | length 12.2
  Top Layer w0.8: C15.1 92.896,62.75 cw(c92.896,61.896) 93.5,62.5 cw(c91.875,60.875) 93.742,59.536 93.691,59.484 93.457,59.25 92.1,59.25 M4.12
NetC16_1: C16.1 M4.15 | length 8.5
  Top Layer w0.8: C16.1 67.175,59.4 67.385,59.19 M4.15
NetD1_2: D1.2 R2.2 | length 2.9
  Top Layer w0.25: D1.2 48.305,28.77 48.575,28.5 R2.2@48.75,28.5
NetD3_1: D3.1 R13.1 | length 3
  Top Layer w0.25: D3.1 22.02,26.25 R13.1
NetD4_1: D4.1 R14.1 | length 3
  Top Layer w0.25: R14.1 34.02,26.25 D4.1
NetQ1_1: Q1.1 R3.1 R5.2 | length 3.1
  Top Layer w0.25: R3.1 Q1.1 94.3,31.2 94.3,29.8 R5.2
NetQ1_3: Q1.3 R6.1 | length 3.1
  Top Layer w0.25: Q1.3 96.15,33.65 96.5,34 R6.1
NetR1_2: R1.2 U1.5 | length 1.5
  Top Layer w0.25: R1.2 U1.5
NetR2_1: R2.1 U1.1 | length 59.5
  Top Layer w0.25: R2.1 v1(50.75,27.25) ; v1@74.25,32 74.428,32.178 74.428,32.265 77.163,35 102.5,35 103.75,33.75 U1.1
  Bottom Layer w0.25: v1(50.75,27.25) 50.779,27.221 69.471,27.221 v1@74.25,32
  other v1: 74.384,32.221
NRST: JP2.2 M1.17 | length 16
  Top Layer w0.25: v1@23.5,44 23.63,43.87 M1.17
  Bottom Layer w0.25: JP2.2 16.377,34.837 17.337,34.837 18.25,35.75 18.25,40.572 22.306,44.628 22.784,44.628 22.831,44.581 23.015,44.581 v1(23.545,44.051)
NSS1121: M1.4 M2.6 M4.6 | length 62.2
  Top Layer w0.25: M1.4 36.33,55.42 39.75,52 v1@45.25,52 ; v1(56.75,51.5) 59.25,49 M2.6 67,49 68.5,50.5 84.588,50.5 89.611,45.477 90.489,44.599 90.544,44.599 90.933,44.21 M4.6
  Bottom Layer w0.25: v1(45.203,51.935) 56.222,51.935 56.657,51.5 v1(56.75,51.5)
RED: M1.18 R14.2 | length 20.5
  Top Layer w0.25: v1@24.75,44 24.9,43.85 M1.18 ; R14.2 v1@31,29
  Bottom Layer w0.25: v1(24.545,44.051) 24.545,35.551 v1(31.045,29.051)
RF1: C9.2 C15.2 JP5.1 | length 6
  Top Layer w0.25: C15.2@85.564,62.937 C15.2@85.75,63.123
  Top Layer w0.8: C9.2 C15.2 ; C15.2@85.75,63.123 JP5.1@85.75,67.23
RF2: C10.2 C16.2 JP6.1 | length 9.2
  Top Layer w0.25: C10.2 C10.2@64.425,59.6
  Top Layer w0.8: C10.2 65,59.5 ; JP6.1@65,67.23 65,59.5 ; C16.2 65,59.5
RST1121: M1.8 M2.14 M4.21 | length 52.4
  Top Layer w0.25: M1.8 31.25,54 35.5,49.75 43.25,49.75 46,47 M2.14 57,47 61.683,42.317 61.933,42.317 v1(62,42.25) ; v1(68,42.25) 69.96,44.21 M4.21
  Bottom Layer w0.25: v1(62,42.25) v1(68,42.25)
RXD: M1.10 U3.8 | length 97.5
  Top Layer w0.25: M1.10 28.71,55.29 35.5,48.5 42.929,48.5 45.964,45.464 45.964,38.786 62,22.75 89.5,22.75 94.5,17.75 95,17.25 98.25,17.25 99.75,18.75 99.75,21.5 99.25,22 U3.8
SCK: M1.1 M2.5 M4.5 U6.6 | length 84.8
  Top Layer w0.25: v1(17.5,56.5) 17.51,56.49 17.51,54.618 U6.6 ; v1(39.75,55.25) 39.759,55.241 40.14,55.241 M1.1 ; 40.259,55.241 41,54.5 v1@45,54.5 ; v1(53.5,53.75) 60.25,47 67.5,47 70.5,50 83.818,50 90.489,43.329 90.544,43.329 90.873,43 M4.5@91.42,43
  Bottom Layer w0.25: v1(17.5,56.5) 18.238,55.762 39.238,55.762 v1(39.75,55.25) ; v1(45.203,54.435) 46.065,54.435 46.425,54.075 53.104,54.075 53.429,53.75 v1(53.5,53.75)
SCL: M1.19 M3.3 R9.1 | length 32
  Top Layer w0.25: M1.19 26.17,44.42 v1(32.25,50.5) ; R9.1 35.08,62.42 M3.3
  Bottom Layer w0.25: v1(32.25,50.5) 34.25,52.5 39,52.5 40.5,54 40.5,56.25 38.25,58.5 36.58,58.5 M3.3
SDA: M1.20 M3.4 R10.1 | length 29.7
  Top Layer w0.25: M1.20 27.44,44.19 v1@32.944,49.694 ; R10.1 37.62,62.38 M3.4
  Bottom Layer w0.25: v1(32.953,49.685) 35.018,51.75 39.5,51.75 41,53.25 41,56.75 M3.4@37.74,60.01
SWCLK: JP2.3 M1.30 | length 36.8
  Top Layer w0.25: v1(30.342,46.158) 32.184,48 38.25,48 40.14,46.11 M1.30
  Bottom Layer w0.25: JP2.3 17.75,38.75 17.75,41 21.75,45 22.107,45 22.139,45.032 22.951,45.032 22.983,45 28.25,45 29.25,44 30.5,44 31,44.5 31,45.5 v1(30.342,46.158)
SWDIO: JP2.4 M1.29 | length 31
  Top Layer w0.25: v1(29.742,44.766) 29.766,44.766 32.5,47.5 37.75,47.5 38.87,46.38 M1.29
  Bottom Layer w0.25: JP2.4 16.25,40.184 16.64,40.574 16.64,40.64 21.5,45.5 29.008,45.5 v1(29.742,44.766)
TXD: M1.9 U3.9 | length 93.6
  Top Layer w0.25: M1.9 29.98,54.699 35.679,49 43,49 46.5,45.5 46.5,39.425 62.175,23.75 89.75,23.75 95.5,18 98,18 99,19 99,21.25 98.75,21.5 U3.9
UP: M1.11 R15.1 S3.2 SW1.1 | length 56.5
  Top Layer w0.25: M1.11 27.44,52.06 v1(30,49.5) ; R15.1 42.85,19.65 S3.2@42.85,17.5
  Bottom Layer w0.25: v1(30,49.5) 31,48.5 34.101,48.5 35.641,46.96 35.641,39.038 36.5,38.179 SW1.1 41.469,17.531 42.819,17.531 42.85,17.5 S3.2@49.1,17.5
V_BATT: C1.1 JP3.1 Q2.3 R6.2 U1.3 | length 99.6
  Top Layer w0.25: C1.1 C1.1@99.975,32.55
  Top Layer w0.5: Q2.3 24.75,31.634 25.384,31 50,31 60.25,20.75 78.75,20.75 JP3.1@85.25,14.25 ; C1.1 R6.2 ; C1.1@99.975,32.55 100.475,33.05 U1.3
  Bottom Layer w0.5: 85.75,14.488 85.75,19 99.929,33.179 v1(100.81,33.179)
VBUS: C2.1 D1.1 D2.1 JP1.A4 JP1.A9 JP1.B4 JP1.B9 Q2.1 R4.2 U1.4 U2.1 U2.3 | length 116.3
  Top Layer w0.25: U2.3@100.525,26.525 U2.3 ; 101.564,24.561 101.625,24.5 ; U1.4@101.75,30.297 U1.4 ; 106.265,24.485 JP1.A9@107.56,24.485 ; JP1.A4 JP1.B9 108.2,19.7 109.5,21 109.5,23 108.2,24.3 JP1.B4
  Top Layer w0.5: D2.1 22.585,32.665 23.2,32.05 Q2.1 23.8,31.2 24.7,30.3 v1(44.25,30.3) ; v1(59,29.25) 89,29.25 90.5,27.75 96.5,27.75 98.5,29.75 100.525,29.75 ; U2.3@100.525,26.525 100.525,29.75 ; U2.1 101.625,24.5 C2.1 ; U2.3 101.564,26.5 ; 101.564,24.561 101.564,26.5 ; U1.4@101.75,30.297 101.203,29.75 100.525,29.75 ; 106.265,24.485 104.25,26.5 101.564,26.5
  Bottom Layer w0.25: v1(44.25,30.3) v1@44.25,30.423
  Bottom Layer w0.5: v1(44.25,30.3) 44.25,27.98 D1.1 ; v1@44.25,30.423 44.827,31 49.25,31 51,29.25 v1(59,29.25)
VCC: C3.1 C6.1 U2.5 U3.7 U3.10 | length 9.2
  Top Layer w0.25: 96.25,22.5 U3.7 ; 96.75,21 97.797,21 97.825,20.972 C3.1@97.825,19.5
  Top Layer w0.5: C6.1 96.25,22.5 96.25,21.5 96.75,21 ; C6.1@96.45,24.5 U2.5
VCC1: C7.1 C11.1 C14.2 JP2.1 M1.28 M3.2 R9.2 R10.2 R11.2 R12.2 R15.2 R16.2 U4.5 U6.8 | length 133.6
  Top Layer w0.25: C14.2 C14.2@13.392,54.608 ; JP2.1@16.17,32.25 JP2.1 ; 16.25,27.5 20.5,23.25 25,23.25 ; R11.2 25,23.25 ; R15.2 41.5,21.25 40.5,22.25 R12.2 40.5,25.5 40,26 36.5,26 35.25,24.75 25.25,24.75 25,24.5 25,23.25
  Top Layer w0.5: C14.2 R16.2 12,49.25 11.75,49 11.75,34.75 14.25,32.25 JP2.1@16.17,32.25 ; C14.2@13.392,54.608 U6.8 ; 16.25,27.5 JP2.1 17.92,32.17 19.25,33.5 19.25,37.5 21.7,39.95 33.904,39.95 34.05,39.804 U4.5 C11.1@37.325,39 ; M3.2 32.54,62.79 33.75,64 R9.2 R10.2 ; C11.1@37.6,38.925 M1.28
  Bottom Layer w0.5: v1(13.31,53.679) 13.31,56.31 14.75,57.75 21.192,57.75 25.192,61.75 30.79,61.75 M3.2
VCC2: C8.1 C13.1 C17.1 M2.1 M4.25 U5.5 | length 13.3
  Top Layer w0.25: C13.1@67.075,39 C13.1 ; C8.1 C8.1@69.68,39.13
  Top Layer w0.5: M2.1 C13.1@67.075,39 ; C13.1 C8.1@69.375,38.825 ; U5.5 C8.1@69.3,38.75 ; C8.1@69.68,39.13 M4.25
pads on no net: JP1.A5 JP1.A8 JP1.B5 JP1.B8 JP1.MH M1.24 M2.13 M2.16 M2.17 M4.2 M4.20 M4.23 M4.24 U2.4 U3.4 U3.5 U3.6 U4.4 U5.4 U6.3 U6.7

## Polygon pours and split planes (outlines as drawn)
GND on Bottom Layer "GND_L02_P001" (solid, remove dead copper, pour order 1): 0,0 0,70 115,70 115,0
GND on Top Layer "GND_L01_P000" (solid, remove dead copper, pour order 0): 0,0 0,70.25 115,70.25 115,0

## Keep-outs
Keep-Out Layer:
  the board outline again, w0.254

## Other copper
Top Layer:
  rectangle net GND: 90,57 93,58.5
  rectangle net GND: 89.935,60.013 92.926,61.277
  rectangle net GND: 74,57 77,58.5
  rectangle net GND: 74,59.897 77,61.5
  rectangle net GND: 62.5,51.75 66.5,54
  rectangle net GND: 47.5,50 51.5,54
  rectangle net GND: 24.5,55.25 25.25,57.75
  rectangle net GND: 21.5,55.25 22.923,57.75
  pour cut-out: 62.75,42.75 62.75,42 66.25,42 66.25,42.75
  pour cut-out: 62.75,40.25 62.75,39.5 66.5,39.5 66.5,40.25
  pour cut-out: 46.75,44.25 46.75,39.5 51.25,39.5 51.25,44.25
  pour cut-out: 14.5,56.028 14.5,53.188 19.27,53.188 19.27,56.028
  pour cut-out: 15.25,49.25 15.25,46.34 15.26,46.33 18,46.33 18,49.17
  pour cut-out: 66,60.25 66,58.75 67.092,58.75 67.17,58.672 67.25,58.752 67.25,60.25
  pour cut-out: 63.25,60.25 63.25,58.75 64.5,58.75 64.439,60.15
  pour cut-out: 85.75,63.25 85.75,62 87.25,62 87.25,63 87,63.25
  pour cut-out: 82.75,63.4 82.75,62 84,62 84,63.4
  pour cut-out: 58.25,50.72 58.25,49.28 66.15,49.28 66.15,50.72
  pour cut-out: 47.65,49.857 47.65,46.5 51.15,46.5 51.15,49.75
  pour cut-out: 23,60.5 23,59.11 24.39,59.11 24.39,60.5

## Silkscreen, mask and mechanical layers (free items; w line width, h text height)
Top Overlay:
  text "RF2" at 69.993,67.483 h1
  text "RF1" at 29.993,67.233 h1
  text "RF3" at 90.493,67.233 h1
  text "GND" at 11.9,41.9 h1
  text "DIO" at 12.15,39.4 h1
  text "CLK" at 11.993,36.733 h1
  text "RST" at 11.993,34.233 h1
  text "VCC" at 11.9,31.65 h1
  text "USB" at 108.903,29.323 h1
  text "LoRa BRIDGE" at 61.45,16.95 h1.5
  text "v.2026.09" at 63.2,13.95 h1.5
  text "(c) GBL 2026" at 60.95,10.95 h1.5

## Text inside footprints (layer, text, board x,y; h text height)
D1: Top Overlay "+" at 46.75,23.5 h1.5 r90
D3: Top Overlay "+" at 22.75,23.5 h1.5 r90
D4: Top Overlay "+" at 37.25,25 h1.5 r90